# EAGLE board Soldering Iron V2 (EAGLE 9.3.1)
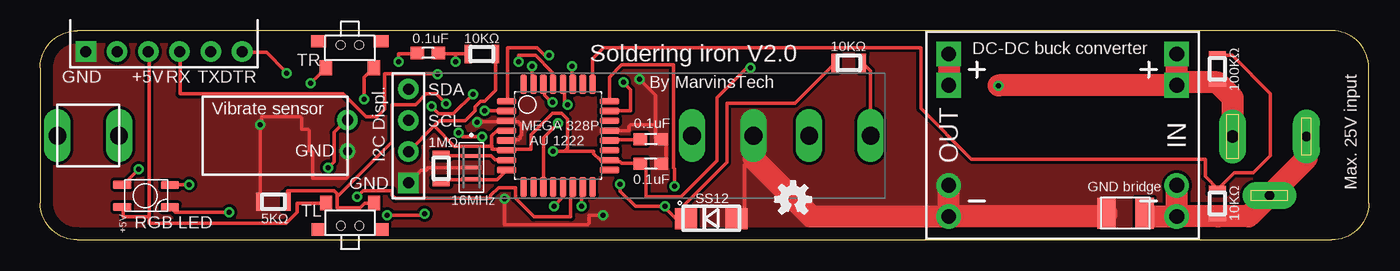
[diagram p0: board, top side]
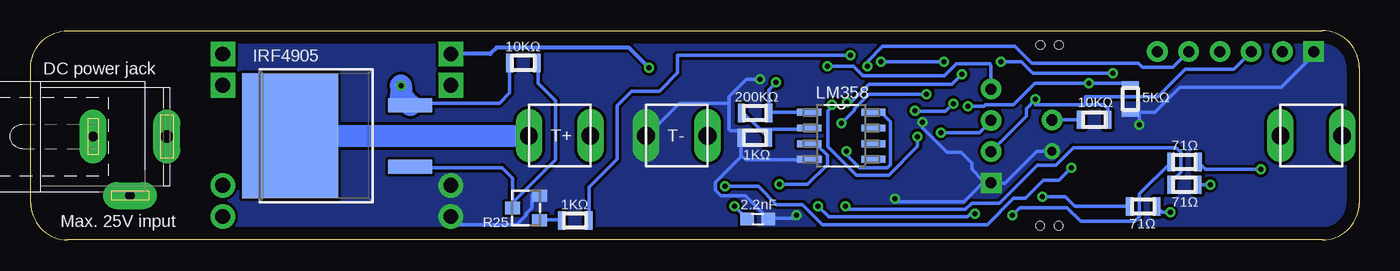
[diagram p1: board, bottom side, seen from below]

Size 108 x 17 mm. Coordinates in mm from the lower left corner, seen from the top.
Outline: 3,0 105,0 arc90 108,3 108,14 arc90 105,17 3,17 arc90 0,14 0,3 arc90 3,0
Copper layers (1*16): Top 0.035mm / dielectric 1.5mm / Bottom 0.035mm
Design rules "default *": minimum track width 11mil, minimum drill 0.35mm, track to track 9mil, track to pad 9mil, pad to pad 9mil, via to via 9mil, smd to smd 9mil, copper to edge 40mil, drill to drill 6mil, minimum pad ring 10mil, minimum via ring 8mil, stop-mask expansion 4mil, vias tented up to drill 0mil, thermal gap 10mil
Net classes: 0 default: width 0.203 mm, drill 0.406 mm, clearance 0.203 mm
vRestrict: area 80,3 to 83,14; area 77.5,5.5 to 80,11.5; area 72.5,6 to 75,11; area -12.1,2.9 to -12,2.9; area -17,2.9 to -17,2.9; area -16.7,2.9 to -16.7,2.9; area -16.4,2.9 to -16.4,2.9; area -15.9,2.9 to -15.9,2.9; area -12.1,2.9 to -12.1,2.9; area -12,2.9 to -12,2.9; area -17,2.9 to -16.9,2.9; area -16.7,2.9 to -16.7,2.9; 132 more areas
Milling: area -17,2.9 to -17,3; area -16.8,2.9 to -16.8,3; area -12,3 to -12,3; area -12,3.1 to -12,3.2; area -12,3.2 to -12,3.2; area -12,3.2 to -12,3.2; area -12,3.2 to -12,3.2; area -12,3.2 to -12,3.2; area -12,3.2 to -12,3.2; area -12,3.2 to -12,3.2; area -12.1,3.2 to -12.1,3.2; area -12,3.2 to -12,3.2; 224 more areas

## Footprints (pad centres in the part's own frame; a part is rotated, then mirrored left to right if it is on the bottom)
0603 = smd 1.1 x 1: 1 -0.85,0; 2 0.85,0
DO214AC = smd 1.8 x 1.7: A 2.05,0; C -2.05,0
SPC4077 = drill 0.8 pad 2.184 long: 1 -3,0; 2 0,-4.8 | drill 1 pad 2.184 long: 3 3,0
SW4-SMD-7.0X3.5X3.5MM-90D = smd 1 x 1.2: 1 -1.931,2.161; 2 1.971,2.161 | smd 1.2 x 1: S1 -2.522,0.014; S2 2.562,0.014 | hole 0.7: -0.73,0.32; 0.77,0.32
SMK = smd 0.7 x 1.5: 1 1.1,0; 2 -1.1,0
SOIC127P620X175-8N = smd 1.981 x 0.559: 1 -2.614,1.905; 2 -2.614,0.635; 3 -2.614,-0.635; 4 -2.614,-1.905; 5 2.614,-1.905; 6 2.614,-0.635; 7 2.614,0.635; 8 2.614,1.905
QFP80P900X900X120-32N = smd 1.6 x 0.55: 1 -4.18,2.8; 2 -4.18,2; 3 -4.18,1.2; 4 -4.18,0.4; 5 -4.18,-0.4; 6 -4.18,-1.2; 7 -4.18,-2; 8 -4.18,-2.8; 17 4.18,-2.8; 18 4.18,-2; 19 4.18,-1.2; 20 4.18,-0.4; 21 4.18,0.4; 22 4.18,1.2; 23 4.18,2; 24 4.18,2.8 | smd 0.55 x 1.6: 9 -2.8,-4.18; 10 -2,-4.18; 11 -1.2,-4.18; 12 -0.4,-4.18; 13 0.4,-4.18; 14 1.2,-4.18; 15 2,-4.18; 16 2.8,-4.18; 25 2.8,4.18; 26 2,4.18; 27 1.2,4.18; 28 0.4,4.18; 29 -0.4,4.18; 30 -1.2,4.18; 31 -2,4.18; 32 -2.8,4.18
DC-DC-STEP-DOWN-MP1584 = drill 1.2 pad 2 square: IN+.1 -9.271,-4.064; IN+.2 -9.271,-6.604; OUT+.1 9.271,-4.064; OUT+.2 9.271,-6.604 | drill 1.2 pad 2: IN-.1 -9.271,6.604; IN-.2 -9.271,4.064; OUT-.1 9.271,6.604; OUT-.2 9.271,4.064
D2PAK-5 = smd 1.143 x 3.556: P1 -2.504,-7.808; P2 2.504,-7.808 | smd 10.16 x 7.8: P3 0,1.934
TO236 = smd 1 x 1.2: P1 0,1.1; P2 1,-1.1; P3 -1,-1.1
I2C_DISPLAY = drill 0.9 pad 1.676: +5V 2.54,0; SCL 2.54,2.54; SDA 2.54,5.08 | drill 0.9 pad 1.676 square: GND 2.54,-2.54
VIBRATESENSOR = drill 0.75 pad 1.27: GND 0,-1.27 | drill 0.9 pad 1.676: HALL 0,1.27
FUSECLIP = drill 1.448 pad 1.905 long: P1 0,0; P2 5,0
RESISTOR1 = smd 1.5 x 2.5: P1 -0.55,-0.75; P2 2.55,-0.75
RGBLED = smd 0.686 x 1.499: +5V -1.556,2.095; P1 0.254,2.095; P2 -1.587,-1.778; P3 0.222,-1.778
PROGRAMMER = drill 0.9 pad 1.676: +5V -1.27,0; DTR 6.35,0; P1 -3.81,0; RX 1.27,0; TX 3.81,0 | drill 0.9 pad 1.676 square: GND -6.35,0
OSC_CSTCE16M0V53-R0 = smd 0.3 x 1.6: 1 -0.95,0; 2 0,0; 3 0.95,0

## Placement (x,y rotation side)
C1  2.2nF  [0603]  48.89,1.71 0 bottom
C2  0.1uF  [0603]  31.52,15.19 180 top
C3  0.1uF  [0603]  49.63,6.19 180 top
C4  0.1uF  [0603]  49.64,8.19 180 top
D1  SS12  [DO214AC]  54.54,1.73 0 top
J1  [SPC4077]  99.93,8.41 0 bottom
K1  SMD-BUTTON(2+2P-7X3.5MM-90D)  [SW4-SMD-7.0X3.5X3.5MM-90D]  25.17,0.84 0 top
K2  SMD-BUTTON(2+2P-7X3.5MM-90D)  [SW4-SMD-7.0X3.5X3.5MM-90D]  25.19,16.16 180 top
R1_10KΩ  [SMK]  67.96,14.39 180 bottom
R2_1KΩ  [SMK]  63.75,1.59 0 bottom
R3_10KΩ  [SMK]  65.73,14.39 0 top
R4_1KΩ  [SMK]  49.13,8.31 180 bottom
R5_200KΩ  [SMK]  49.12,10.31 0 bottom
R6_10KΩ  [SMK]  35.9,15.11 180 top
R7_1MΩ  [SMK]  32.59,5.82 270 top
R8_2KΩ  [SMK]  18.96,3.11 180 top
R9_2KΩ  [SMK]  18.61,11.46 270 bottom
R10_10KΩ  [SMK]  21.54,9.76 0 bottom
R11_10KΩ  [SMK]  95.69,2.96 90 top
R12_100KΩ  [SMK]  95.69,13.9 90 top
R13_71Ω  [SMK]  14.22,4.49 0 bottom
R14_71Ω  [SMK]  17.56,2.71 0 bottom
R15_71Ω  [SMK]  14.21,6.34 180 bottom
U1  LM358M  [SOIC127P620X175-8N]  42.11,8.46 0 bottom
U2  ATMEGA328P-AUR  [QFP80P900X900X120-32N]  42.1,8.48 0 top
U$1  DC-DC-STEP-DOWN-MP1584  [DC-DC-STEP-DOWN-MP1584]  83.12,8.5 180 top
U$2  IRF4905STRLPBF  [D2PAK-5]  84.96,8.46 90 bottom
U$3  2SC3356NPNBJT  [TO236]  67.73,2.6 90 bottom
U$4  I2C_DISPLAY  [I2C_DISPLAY]  27.39,7.18 0 top
U$5  VIBRATESENSOR  [VIBRATESENSOR]  24.98,8.48 0 top
U$6  FUSECLIPS  [FUSECLIP]  62.51,8.48 0 top
U$7  FUSECLIPS  [FUSECLIP]  52.99,8.48 0 top
U$8  FUSECLIPS  [FUSECLIP]  1.4,8.48 0 top
U$9  SHUNT_RESISTOR1  [RESISTOR1]  89.22,1.42 180 top
U$10  RGBLED  [RGBLED]  8.77,4.24 90 top
U$11  PROGRAMMER  [PROGRAMMER]  10.06,15.3 0 top
U$15  OSHW-LOGOS  [OSHW-LOGO-S]  61.2,3.3 0 top
Y1  CSTCE16M0V53-R0  [OSC_CSTCE16M0V53-R0]  35.05,5.88 270 top

## Library data of the parts
C1 = SMD Cap; PROD_ID: CAP-07877
C2-C4 = SMD Cap; PROD_ID: CAP-00810
D1 = SS12; AVAILABILITY: Unavailable; DESCRIPTION: SS12 Series 500 mV 1 A 20 V Max Reverse Voltage Schottky Rectifier - DO-214AC; MF: Klein Tools,; MP: SS12; PACKAGE: DO-214AC-214 ON Semiconductor; PRICE: None
J1 = DC Power Jack; OC_FARNELL: unknown; OC_NEWARK: unknown
K1 K2 = SMD-BUTTON_2_2P-7X3.5MM-90D_; AVAILABILITY: Unavailable; MF: Best Inc.; MP: TS-1188E; PACKAGE: None; PRICE: None
R1_10KΩ R2_1KΩ R3_10KΩ R4_1KΩ R5_200KΩ R6_10KΩ R7_1MΩ R8_2KΩ R9_2KΩ R10_10KΩ R11_10KΩ R12_100KΩ R13_71Ω R14_71Ω R15_71Ω = resistor-shunt
U1 = LM358M; AVAILABILITY: Unavailable; DESCRIPTION: 8 pin Low Power Dual Operational Amplifier 95 per tube; MF: ON Semiconductor; MP: LM358M; PACKAGE: SOIC-8 Texas Instruments; PRICE: None
U2 = ATMEGA328P-AUR; AVAILABILITY: Unavailable; DESCRIPTION: ATmega328P Series 8 Bit 2 kB RAM 32 kB Flash SMT Microcontroller - TQFP-32; MF: Microchip; MP: ATMEGA328P-AUR; PACKAGE: TQFP-32 Microchip; PRICE: None
U$1 = diy-modules
U$2 = D2PAK-5
U$3 = TO236
U$4-U$9 U$11 = Eigene Library
U$10 = RGB LED
U$15 = SparkFun
Y1 = CSTCE16M0V53-R0; AVAILABILITY: Unavailable; DESCRIPTION: Ceramic Resonator 16MHz ??0.5% _Tol_ ??0.3% _Stability_ 15pF 40Ohm 3-Pin CSMD T/R; MF: Murata; MP: CSTCE16M0V53-R0; PACKAGE: SMD-3 Murata; PRICE: None

## Nets
+5V: C3.2 K1.1 K2.1 R6_10KΩ.2 R10_10KΩ.1 U1.8 U2.4 U2.6 U2.18 U$1.OUT+.1 U$1.OUT+.2 U$4.+5V U$10.+5V U$11.+5V
DTR: C2.2 U$11.DTR
GND: C1.2 C3.1 C4.1 D1.A R4_1KΩ.1 R8_2KΩ.1 R9_2KΩ.1 U1.4 U2.3 U2.5 U2.21 U$1.OUT-.1 U$1.OUT-.2 U$3.P2 U$4.GND U$5.GND U$7.P2 U$9.P2 U$11.GND Y1.2
GNDA: J1.1 J1.2 R11_10KΩ.2 U$1.IN-.1 U$1.IN-.2 U$9.P1
LED_B: R15_71Ω.1 U2.15
LED_G: R13_71Ω.2 U2.13
LED_R: R14_71Ω.2 U2.14
N$1: R1_10KΩ.2 U$2.P1 U$3.P1
N$2: R2_1KΩ.2 U$3.P3
N$3: C4.2 U2.20
N$4: R7_1MΩ.2 U2.7 Y1.1
N$5: R7_1MΩ.1 U2.8 Y1.3
N$6: R14_71Ω.1 U$10.P2
N$7: R13_71Ω.1 U$10.P3
N$8: R15_71Ω.2 U$10.P1
PWM_MOS: R2_1KΩ.1 U2.1
RESET: C2.1 R6_10KΩ.1 U2.29
RX: U2.30 U$11.RX
SCL: U2.28 U$4.SCL
SDA: U2.27 U$4.SDA
T_L: K1.2 R8_2KΩ.2 U2.2
T_R: K2.2 R9_2KΩ.2 U2.11
TEMP: R5_200KΩ.1 U1.1 U2.23
TEMP_SENSE: R3_10KΩ.1 U$2.P3 U$6.P2
TX: U2.31 U$11.TX
V+: C1.1 D1.C R3_10KΩ.2 U1.3
V-: R4_1KΩ.2 R5_200KΩ.2 U1.2
VCC: J1.3 R1_10KΩ.1 R12_100KΩ.2 U$1.IN+.1 U$1.IN+.2 U$2.P2
VIBRATE_SENSOR: R10_10KΩ.2 U2.24 U$5.HALL
VOLTAGE: R11_10KΩ.1 R12_100KΩ.1 U2.25

## Tracks (layer width: path | path; a pad name or v marks a point on that pad's centre or on a via)
+5V  (via drill 0.41)
  Top 0.279: 8.88,1.88 6.75,1.88 6.75,2.62 U$10.+5V | K1.1 23.12,3 20.88,3 20.88,2.25 20,1.38 8.88,1.38 8.88,1.88 | 8.88,1.88 8.88,15.38 U$11.+5V | 36.7,7.62 36.7,8.45 37.12,8.88 37.88,8.88 U2.4 | K2.1 26.33,13.2 v26.33,11.43 | U$4.+5V 32.01,9.26 | 36.7,7.62 33.65,7.62 32.01,9.26 | 36.7,7.62 36.75,7.62 36.75,7.38 37.88,7.38 U2.6 38,7.38 39.9,7.38 39.9,8.55 41.65,10.3 42.38,10.3 42.85,9.82 42.85,7.45 42.62,7.22 v41.67,7.22 45,7.22 45,7 45.5,6.5 46.25,6.5 U2.18 46.38,6.38 47.12,6.38 47.25,6.25 48.75,6.25 C3.2 48.88,6.12 49.25,5.75 49.25,3.52 52.08,3.52 55,6.45 55,11.55 57.47,14.03 57.67,14.03 v57.72,13.97 | 32.01,9.26 32.45,9.7 34.55,9.7 35.35,10.5 35.35,10.82 35.8,11.28 36.12,11.28 37,12.15 R6_10KΩ.2
  Top 1.8: U$1.OUT+.2 U$1.OUT+.1
  Bottom 0.279: U$4.+5V 29.88,7.25 27.08,10.05 27.08,10.68 v26.33,11.43 26.33,11 22.25,11 | R10_10KΩ.1 20.44,10.69 20.75,11 22.25,11 | v41.67,7.22 41.67,6.92 40.62,5.88 38.38,5.88 38.12,6.12 38.12,9.62 38.75,10.25 39.38,10.25 U1.8 | 73.75,15.12 U$1.OUT+.2 | U$11.+5V 10.22,13.88 14.12,13.88 16.38,11.62 22.25,11.62 22.25,11
  Bottom 0.305: 73.75,15.12 70.65,15.12 70.15,15.62 59.38,15.62 v57.72,13.97
DTR  (via drill 0.41)
  Top 0.279: v29.15,14.47 29.15,15.12 30.62,15.12 C2.2 | U$11.DTR 16.61,15.24 18.39,15.24 19.91,13.72 v20.02,13.55
  Bottom 0.279: v29.15,14.47 27.48,14.47 26.55,13.55 v20.02,13.55
GND  (via drill 0.41)
  Top 0.279: C3.1 50.5,6.25 50.88,6.25 50.88,8.25 50.5,8.25 C4.1 50.38,8.25 50,8.25 50,9.38 | 50,9.38 48,9.38 47.88,9.25 47.88,8.88 46.38,8.88 U2.21 | v48.72,13.05 50,11.78 50,9.38 | D1.A 56.62,1.75 57.25,1.75 57.25,6.12 57.99,6.58 | 73.75,1.92 73.75,2 U$1.OUT-.1 | U2.5 38,8.12 38.88,8.12 39,8.25 39,8.38 39.12,8.5 39.12,9.25 39,9.38 39,9.5 38.88,9.62 38,9.62 U2.3 37.88,9.62 35.52,9.62 v35.52,9.57 | U$4.GND 30.97,5.67 31.42,5.67 31.5,5.75 31.5,5.88 35,5.88 Y1.2 | R8_2KΩ.1 17.88,3.12 v17.88,9.38 18,9.38 18,10 21.12,10 21.25,9.88 21.25,9 21.75,9 21.88,8.88 21.88,7.25 22,7.25 22.12,7.12 22.12,5 24.88,5 25,5.12 25,7.12 U$5.GND | v45.75,2 44.62,2 44.62,1.38 44.5,1.25 37.75,1.25 37.75,3.33 v37.76,3.35
  Top 1.8: U$9.P2 86.42,1.92 73.85,1.92 | 73.85,1.92 U$1.OUT-.2 | U$7.P2 57.99,6.58 62.65,1.92 73.75,1.92 73.85,1.92
  Bottom 0.279: 50.25,6.75 50.25,8.25 R4_1KΩ.1 | 48.12,1.75 C1.2 | U1.4 44.75,6.5 49.88,6.5 50.12,6.75 50.25,6.75 | v48.72,13.05 49.83,13.05 51.25,11.62 51.25,11.12 | 51.25,11.12 51.25,9 51.12,8.88 50.25,8.88 50.25,8.38 R4_1KΩ.1 | U$3.P2 66.75,3.62 67.25,3.62 67.25,2.62 67.75,2.12 67.75,2 68.5,1.25 73.12,1.25 73.75,1.88 U$1.OUT-.1 | 51.25,11.12 55.25,11.12 57.88,8.5 U$7.P2 | v35.52,9.57 35.52,9.12 33.52,7.12 32.38,7.12 31.5,6.25 31.5,5.75 30.5,4.75 | 30.5,4.75 30,4.75 U$4.GND | U$5.GND 26.22,7.21 28.8,4.62 29.88,4.62 U$4.GND | 17.88,10.38 v17.88,9.38 | 17.88,10.38 18.5,10.38 R9_2KΩ.1 | 3.75,15.38 3.75,15 6.32,12.43 14.58,12.43 16.62,10.38 17.88,10.38 | v45.75,2 46,1.75 47.75,1.75 48,1.5 48,1.67 C1.2 | v37.76,3.35 37.54,3.12 32.12,3.12 30.5,4.75 | 50.38,8.38 R4_1KΩ.1 | 30.5,4.75 U$4.GND | 50.25,6.75 51.88,5.12 51.9,5.12 52.35,4.67 52.35,4.03 51.9,3.58 49.91,3.58 C1.2
  pour Top (no thermals): 0,17 0,0 108,0 108,17
  pour Bottom (no thermals): 0,17 108,17 108,0 0,0
GNDA
  Top 0.279: R11_10KΩ.2 95.75,1.88 95.75,1.92 | 92.39,2.75 92.38,2.75 U$1.IN-.1
  Top 1.499: 90.04,1.9 U$9.P1
  Top 1.8: J1.1 102.93,6.61 J1.2 98.24,1.92 95.75,1.92 92.39,1.92 92.39,2.75 U$1.IN-.2 | U$1.IN-.1 90.04,1.9
LED_B  (via drill 0.41)
  Top 0.279: v31.25,2.12 31.15,2.02 v28.2,2.02 | v44,2.75 44,4.25 U2.15
  Bottom 0.279: v28.2,2.02 27.6,2.62 23.75,2.62 22.62,1.5 18.25,1.5 17.88,1.88 17.88,3.75 15.38,6.25 R15_71Ω.1 | v31.25,2.12 31.62,2.12 31.88,1.88 43.12,1.88 v44,2.75
LED_G  (via drill 0.41)
  Top 0.279: v41.75,2.75 42.5,3.5 U2.13
  Bottom 0.279: v41.75,2.75 41.5,2.5 32,2.5 31.5,3 29.25,3 26.17,6.08 24.67,6.08 23.25,7.5 14.88,7.5 14.5,7.12 14.5,5.5 15.25,4.75 15.25,4.5 R13_71Ω.2
LED_R  (via drill 0.41)
  Top 0.279: v25.75,3.5 26.25,4 28.62,4 28.62,3.62 28.88,3.38 36.62,3.38 36.62,3.62 37.25,4.25 38.62,4.25 38.62,3.38 40.12,1.88 43.12,1.88 43.12,3.38 43.25,3.5 43.25,4.25 U2.14
  Bottom 0.279: v25.75,3.5 23.88,3.5 23.12,2.75 18.75,2.75 R14_71Ω.2
N$1
  Bottom 0.279: U$2.P1 77.12,5.88 69.7,5.88 68.83,5 U$3.P1 69.12,2.75 65.35,6.53 65.35,11.32 66.75,12.72 66.75,14.38 R1_10KΩ.2
N$2
  Bottom 0.279: U$3.P3 66.62,1.62 64.88,1.62 R2_1KΩ.2
N$3
  Top 0.279: C4.2 48.75,8.12 46.38,8.12 U2.20
N$4
  Top 0.279: R7_1MΩ.2 32.66,6.83 Y1.1 36.66,6.83 36.97,6.5 37.88,6.5 U2.7
N$5
  Top 0.279: 35.05,4.9 32.8,4.9 R7_1MΩ.1 | Y1.3 35.05,4.9 | 35.05,4.9 37.15,4.9 37.88,5.62 U2.8
N$6  (via drill 0.41)
  Top 0.279: v15.38,2.25 10.95,2.25 U$10.P2
  Bottom 0.279: R14_71Ω.1 16,2.25 v15.38,2.25
N$7  (via drill 0.41)
  Top 0.279: v12.12,4.5 10.62,4.5 U$10.P3
  Bottom 0.279: v12.12,4.5 13,4.5 R13_71Ω.1
N$8  (via drill 0.41)
  Top 0.279: v8,5.75 6.75,4.5 U$10.P1
  Bottom 0.279: v8,5.75 12.5,5.75 13,6.25 R15_71Ω.2
PWM_MOS  (via drill 0.41)
  Top 0.279: v41.38,15 41,15 40.38,15.62 38,15.62 38,11.38 U2.1
  Bottom 0.279: v41.38,15 55.42,15 55.42,13.57 56.9,12.1 59.15,12.1 60.35,10.9 60.35,6.55 62.62,4.28 62.62,1.62 R2_1KΩ.1
RESET  (via drill 0.41)
  Top 0.279: 33.75,15.12 34.75,15.12 R6_10KΩ.1 | 33.75,15.12 32.38,15.12 C2.1 | v38.88,14.5 38.88,15 40.25,15 41.62,13.62 41.62,12.75 U2.29 | 33.75,15.12 v33.75,14.5
  Bottom 0.279: v33.75,14.5 v38.88,14.5
RX  (via drill 0.41)
  Top 0.279: v41.65,11.18 41.58,11.18 41,11.75 41,12.62 U2.30 | v32.3,13.45 32.25,13.5 28,13.5 28,10.62 27.38,10 26.5,10 24.62,11.88 11.38,11.88 11.38,15.24 | 11.38,15.38 11.38,15.24 | U$11.RX 11.27,15.24 11.38,15.24
  Bottom 0.279: v41.65,11.18 41.33,11.18 39.85,12.65 33.1,12.65 v32.3,13.45
SCL  (via drill 0.41)
  Top 0.279: v42.85,11 42.62,11.22 42.62,12.5 42.5,12.62 U2.28 | v35.9,8.4 34.35,8.4 v34.02,8.72
  Bottom 0.279: v42.85,11 42.78,10.93 43.2,10.5 43.2,7.58 40.88,5.25 38.25,5.25 35.9,7.6 v35.9,8.4 | v34.02,8.72 30.9,8.72 30,9.62 U$4.SCL
SDA  (via drill 0.41)
  Top 0.279: v43.25,14.12 43.25,12.75 U2.27
  Bottom 0.279: v43.25,14.12 41.12,14.12 40.35,13.35 33.73,13.35 32.75,14.32 30.05,14.32 29.93,14.13 U$4.SDA
T_L  (via drill 0.41)
  Top 0.279: 24.12,3.62 24.12,3.75 23.88,4 20.12,4 20.12,3.12 R8_2KΩ.2 | 24.12,3.62 24.12,2.62 26,2.62 26.38,3 27.12,3 K1.2 | v36.12,10.5 37.88,10.5 U2.2 | v33,11.07 32.2,11.88 31.38,11.88 30.5,11 28.62,11 28.62,8 24.25,3.62 24.12,3.62
  Bottom 0.279: v36.12,10.5 36.08,10.45 33.62,10.45 v33,11.07
T_R  (via drill 0.41)
  Top 0.279: v22,12.75 23.12,13.88 K2.2 | U2.11 40.9,8.3 v42.08,9.47 | v35.17,11.85 33.58,10.25 32.4,10.25 v31.8,10.85
  Bottom 0.279: R9_2KΩ.2 18.62,12.62 18.75,12.75 v22,12.75 26.38,12.75 28.12,11 30.38,11 30.52,10.85 v31.8,10.85 | v42.08,9.47 41.02,10.53 41.02,10.68 39.85,11.85 v35.17,11.85
TEMP  (via drill 0.41)
  Top 0.279: v47.4,12.8 48,12.2 48,10.5 46.38,10.5 U2.23
  Bottom 0.279: U1.1 44.75,10.38 48,10.38 R5_200KΩ.1 48,10.33 48,12.2 v47.4,12.8
TEMP_SENSE
  Top 0.279: R3_10KΩ.1 66.88,14.38 67.5,13.75 67.5,8.5 U$6.P2
  Bottom 1.8: U$2.P3 67.53,8.46 U$6.P2
TX  (via drill 0.41)
  Top 0.279: v40,14.12 40,12.75 U2.31
  Bottom 0.279: v40,14.12 40,14.5 38.75,15.75 28,15.75 26.62,14.38 17.98,14.38 17.62,14.03 15.17,14.03 13.9,15.29 U$11.TX
V+  (via drill 0.41)
  Top 0.279: R3_10KΩ.2 64.62,14.38 61.38,11.12 55.83,11.12 55.83,6.33 52.28,2.77 52.28,1.78 | 52.28,1.78 52.28,1.7 | v47.15,4.53 47.15,3.98 48.38,2.75 v50.8,2.75 50.8,2.6 51.6,1.8 52.38,1.8 52.38,1.75 D1.C 52.17,1.78 52.28,1.78
  Bottom 0.279: v50.8,2.75 49.76,1.71 C1.1 | v47.15,4.53 44.85,4.53 43.25,6.12 43.25,6.88 44.12,7.75 44.62,7.75 U1.3
V-
  Bottom 0.279: 48.69,8.94 50.12,10.38 R5_200KΩ.2 | 48.69,8.94 48.12,8.38 R4_1KΩ.2 | U1.2 44.75,9 48.62,9 48.69,8.94
VCC  (via drill 0.41)
  Top 0.279: U$1.IN+.2 92.5,15.12 92.39,15.08
  Top 1.8: J1.3 96.93,11.56 R12_100KΩ.2 92.62,12.8 U$1.IN+.1 | U$1.IN+.1 92.39,15.08 | U$1.IN+.1 77.92,12.57 v77.9,12.55
  Bottom 0.279: R1_10KΩ.1 69.06,11.96 69.9,11.12 76.38,11.12 U$2.P2
  Bottom 1.8: v77.9,12.55 77.9,11.71 U$2.P2
VIBRATE_SENSOR  (via drill 0.41)
  Top 0.279: U2.24 46.28,13.23 47.28,14.22 51.5,14.22 51.5,5.88 51.58,5.8 v51.58,4.35 | v23.4,5.88 23.88,6.35 23.88,8.75 24.88,9.75 U$5.HALL
  Bottom 0.279: U$5.HALL 22.75,9.75 R10_10KΩ.2 | v51.58,4.35 48.85,4.35 47.38,2.88 45.25,2.88 43.62,1.25 30.25,1.25 28.12,3.38 27.15,3.38 25.67,4.85 24.42,4.85 v23.4,5.88
VOLTAGE
  Top 0.279: R12_100KΩ.1 96.9,15 100,11.9 100,6.85 98.6,5.45 97.08,5.45 R11_10KΩ.1 95.75,4.12 94.7,5.17 94.7,6.58 75.7,6.58 71.58,10.7 71.58,15.62 45.8,15.62 44.9,14.72 U2.25

## Text on the board
tPlace: 0.1uF | 10KΩ | 10KΩ | DC-DC buck converter | GND | +5V | RX | TX | DTR | TR | Soldering iron V2.0 | Max. 25V input | SDA | By MarvinsTech | 100KΩ | Vibrate sensor | SCL | 0.1uF | GND | 1MΩ | I2C Displ. | GND | 0.1uF | GND bridge | 16MHz | SS12 | TL | 10KΩ | RGB LED | 5KΩ
bPlace: 10KΩ | IRF4905 | DC power jack | LM358 | 5KΩ | 10KΩ | 200KΩ | T- | T+ | 71Ω | 1KΩ | 71Ω | 71Ω | 2.2nF | 1KΩ | R25 | Max. 25V input